# EAGLE board ir_board (EAGLE 6.4)
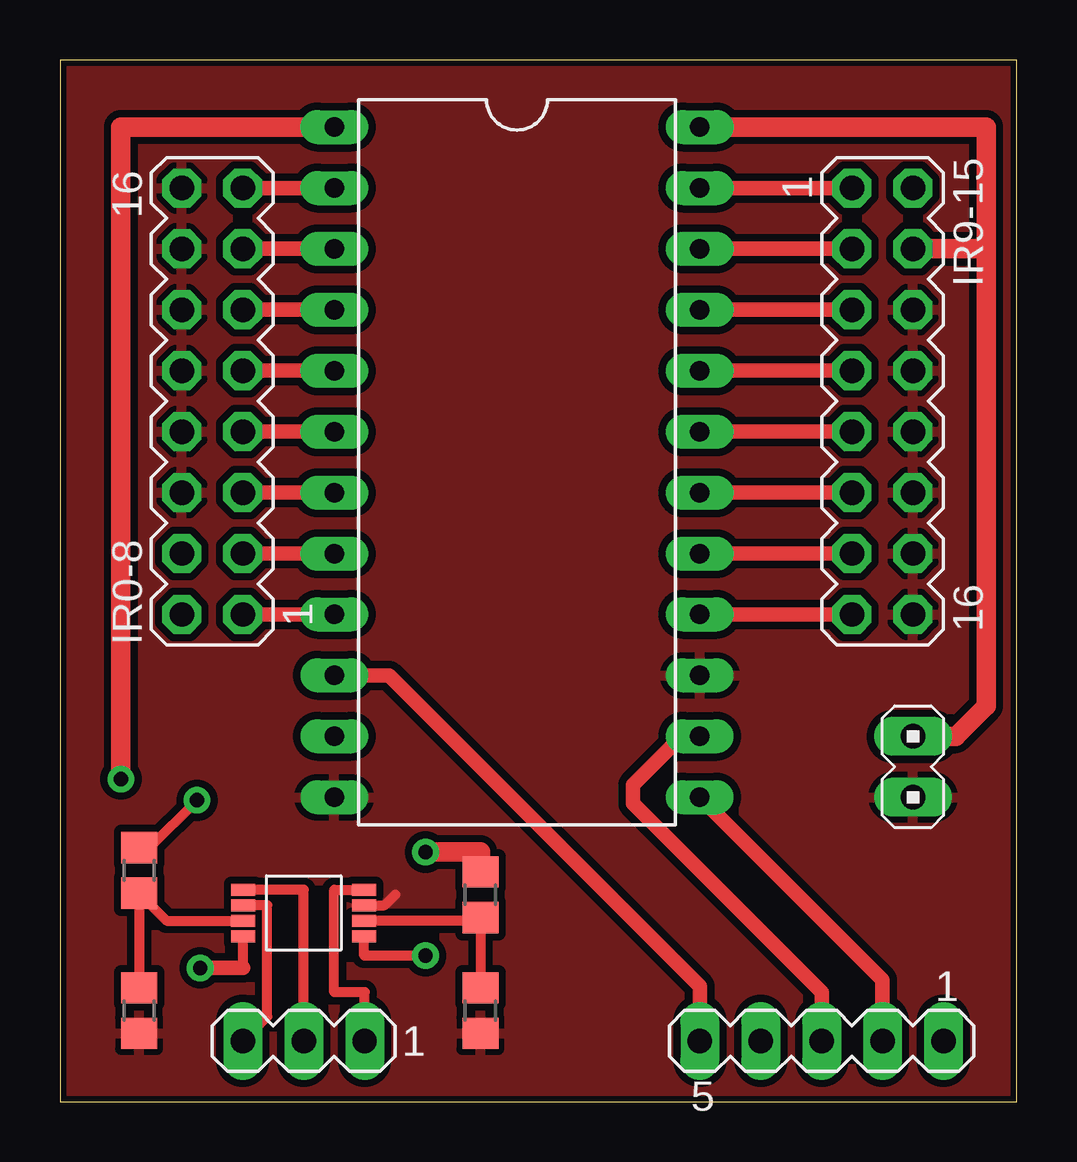
[diagram p0: board, top side]
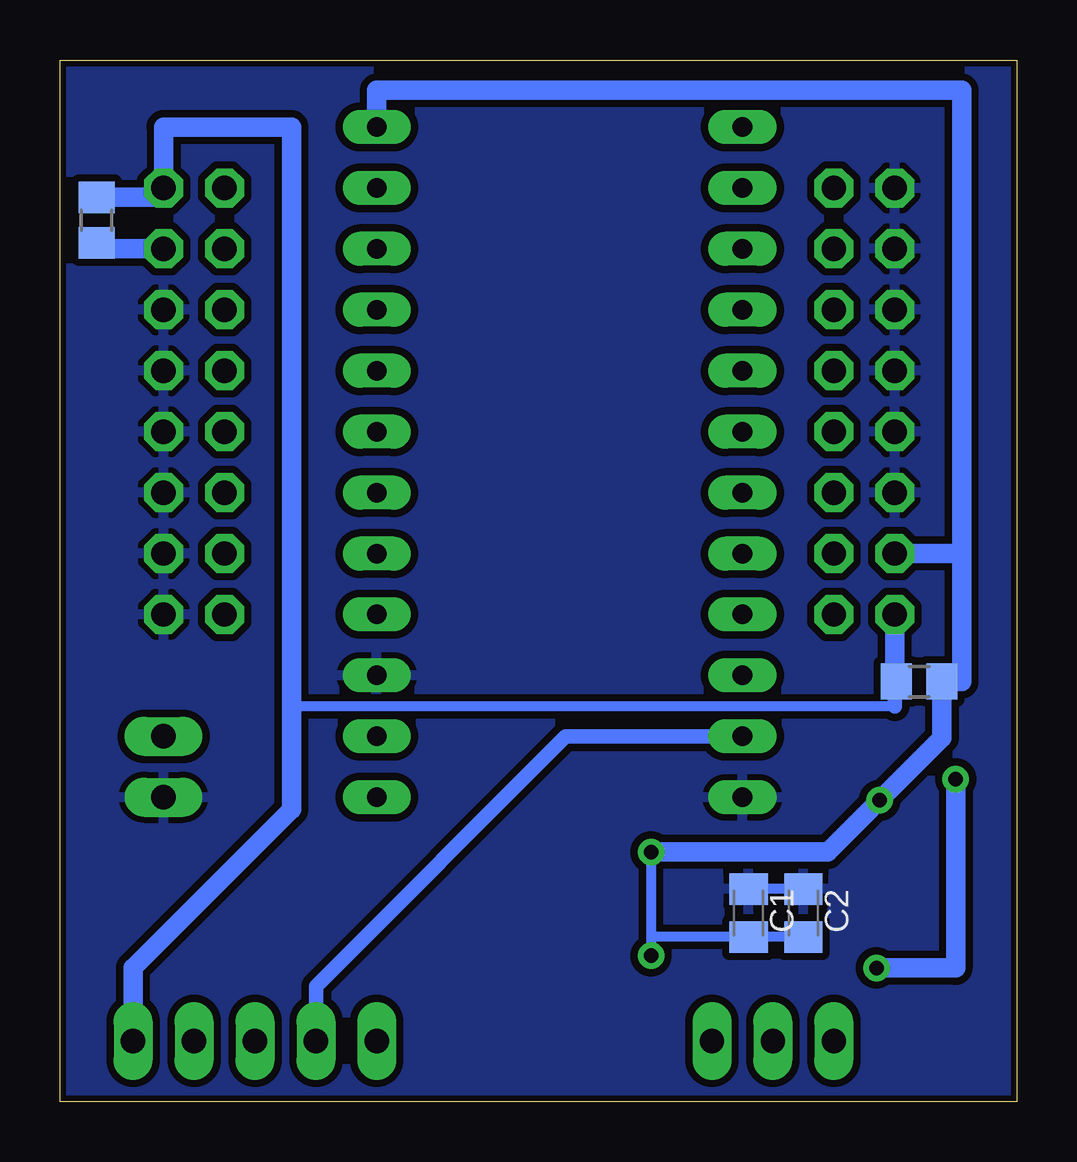
[diagram p1: board, bottom side, seen from below]

Size 39.88 x 43.43 mm. Coordinates in mm from the lower left corner, seen from the top.
Outline: 0,0 39.88,0 39.88,43.43 0,43.43 0,0
Copper layers (1*16): Top 0.035mm / dielectric 1.5mm / Bottom 0.035mm
Design rules "SparkFun": minimum track width 8mil, minimum drill 20mil, track to track 8mil, track to pad 8mil, pad to pad 8mil, via to via 8mil, smd to smd 8mil, copper to edge 10mil, drill to drill 8mil, minimum pad ring 12mil, minimum via ring 10mil, stop-mask expansion 4mil, vias tented up to drill 25mil, thermal gap 10mil
Net classes: 0 default: width 0.203 mm, drill 0.152 mm, clearance 0.254 mm; 1 power: width 0.254 mm, drill 0.203 mm, clearance 0.305 mm

## Footprints (pad centres in the part's own frame; a part is rotated, then mirrored left to right if it is on the bottom)
C0805K = smd 1.3 x 1.6: 1 -1,0; 2 1,0
MA08-2 = drill 1.016 octagon: 1 -8.89,-1.27; 2 -8.89,1.27; 3 -6.35,-1.27; 4 -6.35,1.27; 5 -3.81,-1.27; 6 -3.81,1.27; 7 -1.27,-1.27; 8 -1.27,1.27; 9 1.27,-1.27; 10 1.27,1.27; 11 3.81,-1.27; 12 3.81,1.27; 13 6.35,-1.27; 14 6.35,1.27; 15 8.89,-1.27; 16 8.89,1.27
R0805 = smd 1.3 x 1.5: 1 -0.95,0; 2 0.95,0
MA03-1 = drill 1.016 long: 1 -2.54,0; 2 0,0; 3 2.54,0
MA05-1 = drill 1.016 long: 1 -5.08,0; 2 -2.54,0; 3 0,0; 4 2.54,0; 5 5.08,0
MA02-1 = drill 1.016 long: P$1 -1.27,0; P$2 1.27,0
DIL24-6 = drill 0.813 long: 1 -13.97,-7.62; 2 -11.43,-7.62; 3 -8.89,-7.62; 4 -6.35,-7.62; 5 -3.81,-7.62; 6 -1.27,-7.62; 7 1.27,-7.62; 8 3.81,-7.62; 9 6.35,-7.62; 10 8.89,-7.62; 11 11.43,-7.62; 12 13.97,-7.62; 13 13.97,7.62; 14 11.43,7.62; 15 8.89,7.62; 16 6.35,7.62; 17 3.81,7.62; 18 1.27,7.62; 19 -1.27,7.62; 20 -3.81,7.62; 21 -6.35,7.62; 22 -8.89,7.62; 23 -11.43,7.62; 24 -13.97,7.62
TSSOP-8 = smd 0.5 x 1: P$1 -0.975,-2.525; P$2 -0.325,-2.525; P$3 0.325,-2.525; P$4 0.975,-2.525; P$5 0.975,2.525; P$6 0.325,2.525; P$7 -0.325,2.525; P$8 -0.975,2.525

## Placement (x,y rotation side)
C1  [C0805K]  11.18,7.87 270 bottom
C2  [C0805K]  8.89,7.87 270 bottom
IR0-8  [MA08-2]  6.35,29.21 90 top
IR9-15  [MA08-2]  34.29,29.21 270 top
R1  0ohm  [R0805]  38.35,36.76 270 bottom
R2  0ohm  [R0805]  3.3,9.65 270 top
R3  0ohm  [R0805]  3.3,3.81 90 top
R4  0ohm  [R0805]  17.53,8.64 90 top
R5  0ohm  [R0805]  17.53,3.81 270 top
R6  0ohm  [R0805]  4.06,17.53 0 bottom
SV4  [MA03-1]  10.16,2.54 180 top
SV5  [MA05-1]  31.75,2.54 180 top
U$1  MA02-1  [MA02-1]  35.56,13.97 90 top
U$2  16BIT_ANALOG_MUX  [DIL24-6]  19.05,26.67 270 top
U$3  ADC081C021  [TSSOP-8]  10.16,7.87 270 top

## Library data of the parts
C1 C2 R1-R6 = rcl
IR0-8 IR9-15 SV4 SV5 = con-lstb; OC_FARNELL: unknown; OC_NEWARK: unknown
U$1-U$3 = IEEE_bot_specific_parts

## Nets
A: SV5.5 U$2.10
ADR0: R2.2 R3.2 U$3.P$3
ADR1: R4.1 R5.1 U$3.P$6
ALERT: SV4.3 U$3.P$2
B: SV5.4 U$2.11
GND [power]: C1.1 C2.1 IR0-8.6 IR0-8.8 IR0-8.10 IR0-8.12 IR0-8.14 IR0-8.16 IR9-15.6 IR9-15.8 IR9-15.10 IR9-15.12 IR9-15.14 IR9-15.16 R3.1 R5.2 U$1.P$1 U$2.12 U$2.15 U$3.P$7
LEDON: IR0-8.2 IR9-15.2 R1.1 R6.1 SV5.1
N$1: IR0-8.1 U$2.9
N$2: IR0-8.3 U$2.8
N$3: IR0-8.5 U$2.7
N$4: IR0-8.7 U$2.6
N$5: IR0-8.9 U$2.5
N$6: IR0-8.11 U$2.4
N$7: IR0-8.13 U$2.3
N$8: IR0-8.15 U$2.2
N$9: IR9-15.1 U$2.23
N$10: IR9-15.3 U$2.22
N$11: IR9-15.5 U$2.21
N$12: IR9-15.7 U$2.20
N$13: IR9-15.9 U$2.19
N$14: IR9-15.11 U$2.18
N$15: IR9-15.13 U$2.17
N$16: IR9-15.15 U$2.16
N$17: SV5.2 U$2.13
N$18: SV5.3 U$2.14
OUT: U$2.1 U$3.P$4
SCL: SV4.2 U$3.P$1
SDA: SV4.1 U$3.P$8
VCC [power]: C1.2 C2.2 IR0-8.4 IR9-15.4 R1.2 R2.1 R4.2 R6.2 U$1.P$2 U$2.24 U$3.P$5

## Tracks (layer width: path | path; a pad name or v marks a point on that pad's centre or on a via)
A
  Top 0.61: SV5.5 26.67,4.83 13.72,17.78 U$2.10
ADR0
  Top 0.406: R3.2 R2.2 4.46,7.55 U$3.P$3
ADR1
  Top 0.406: U$3.P$6 17.53,7.55 R4.1 R5.1
ALERT
  Top 0.406: SV4.3 8.64,3.56 8.64,8.2 U$3.P$2
B
  Bottom 0.61: SV5.4 29.21,4.83 18.8,15.24 U$2.11
GND
  Top 0.406: U$3.P$7 13.53,8.2 13.97,8.64
  Top 0.813: U$1.P$1 35.31,12.95
  Bottom 0.406: C2.1 C1.1
  pour Top (isolate 0.254): 0,46.99 41.15,47.24 40.64,0 0,0
  pour Bottom (isolate 0.254): -0.25,47.5 41.15,47.75 41.15,-0.51 -0.25,-0.25
LEDON
  Bottom 0.406: 5.08,16.48 30.23,16.48
  Bottom 0.61: 5.08,17.53 5.08,16.48
  Bottom 0.813: R1.1 35.56,37.71 IR9-15.2 35.56,40.64 30.23,40.64 30.23,16.48 30.23,12.19 36.83,5.59 SV5.1 | R6.1 5.08,17.53 IR0-8.2
N$1
  Top 0.61: IR0-8.1 U$2.9
N$2
  Top 0.61: IR0-8.3 U$2.8
N$3
  Top 0.61: IR0-8.5 U$2.7
N$4
  Top 0.61: IR0-8.7 U$2.6
N$5
  Top 0.61: IR0-8.9 U$2.5
N$6
  Top 0.61: IR0-8.11 U$2.4
N$7
  Top 0.61: IR0-8.13 U$2.3
N$8
  Top 0.61: IR0-8.15 U$2.2
N$9
  Top 0.61: IR9-15.1 U$2.23
N$10
  Top 0.61: IR9-15.3 U$2.22
N$11
  Top 0.61: U$2.21 IR9-15.5
N$12
  Top 0.61: IR9-15.7 U$2.20
N$13
  Top 0.61: U$2.19 IR9-15.9
N$14
  Top 0.61: IR9-15.11 U$2.18
N$15
  Top 0.61: U$2.17 IR9-15.13
N$16
  Top 0.61: U$2.16 IR9-15.15
N$17
  Top 0.61: SV5.2 34.29,5.08 U$2.13
N$18
  Top 0.61: SV5.3 31.75,4.57 23.88,12.45 23.88,13.21 25.91,15.24 U$2.14
OUT  (via drill 0.6)
  Top 0.406: 7.63,5.59 U$3.P$4
  Top 0.61: v5.84,5.59 7.63,5.59
  Top 0.813: U$2.1 2.54,40.64 v2.54,13.46
  Bottom 0.813: v2.54,13.46 2.54,5.59 v5.84,5.59
SCL
  Top 0.406: SV4.2 10.16,8.85 U$3.P$1
SDA
  Top 0.406: SV4.1 12.7,4.57 11.43,4.57 11.43,8.85 U$3.P$8
VCC  (via drill 0.6)
  Top 0.406: v15.24,6.1 12.69,6.1 U$3.P$5 | 15.24,10.35 v15.24,10.41 | R2.1 3.74,10.6 v5.71,12.57
  Top 0.813: U$1.P$2 37.34,15.24 38.61,16.51 38.61,35.56 | IR9-15.4 38.61,35.56 | 38.61,35.56 38.61,40.64 U$2.24 | v15.24,10.41 17.53,10.41 R4.2
  Bottom 0.406: v15.24,10.41 v15.24,6.1 15.24,6.87 C1.2 C2.2
  Bottom 0.813: U$2.24 26.67,42.16 2.29,42.16 2.29,22.86 | 2.29,22.86 2.29,17.53 R6.2 3.11,15.17 v5.71,12.57 7.87,10.41 v15.24,10.41 | 2.29,22.86 IR0-8.4 | R1.2 38.35,35.56 IR9-15.4

## Text on the board
tDocu: VCC | GND | VCC | VCC | ADR0 | ADR1 | LEDON | SEL_A | SEL_B | SEL_C | SEL_D | SCA | SDA | GND | GND | ALRT
bDocu: Short for / LEDON=VCC | 16 Bit IR ARRAY / 2x Pololu QTR-8A / v. 2013/11/27 | Short for / LEDON=VCC | Debounce Caps